# Altium PCB uku20710_proc.PcbDoc (part 1 of 3)
Units mm, origin at the board's own origin, x right, y up, seen from the top; angles counter-clockwise.
Board outline 354.7 x 156.7 mm, 4 copper layers (Top Layer, MidLayer1, MidLayer2, Bottom Layer); 286 components, 533 nets, 991 pads, 570 vias.
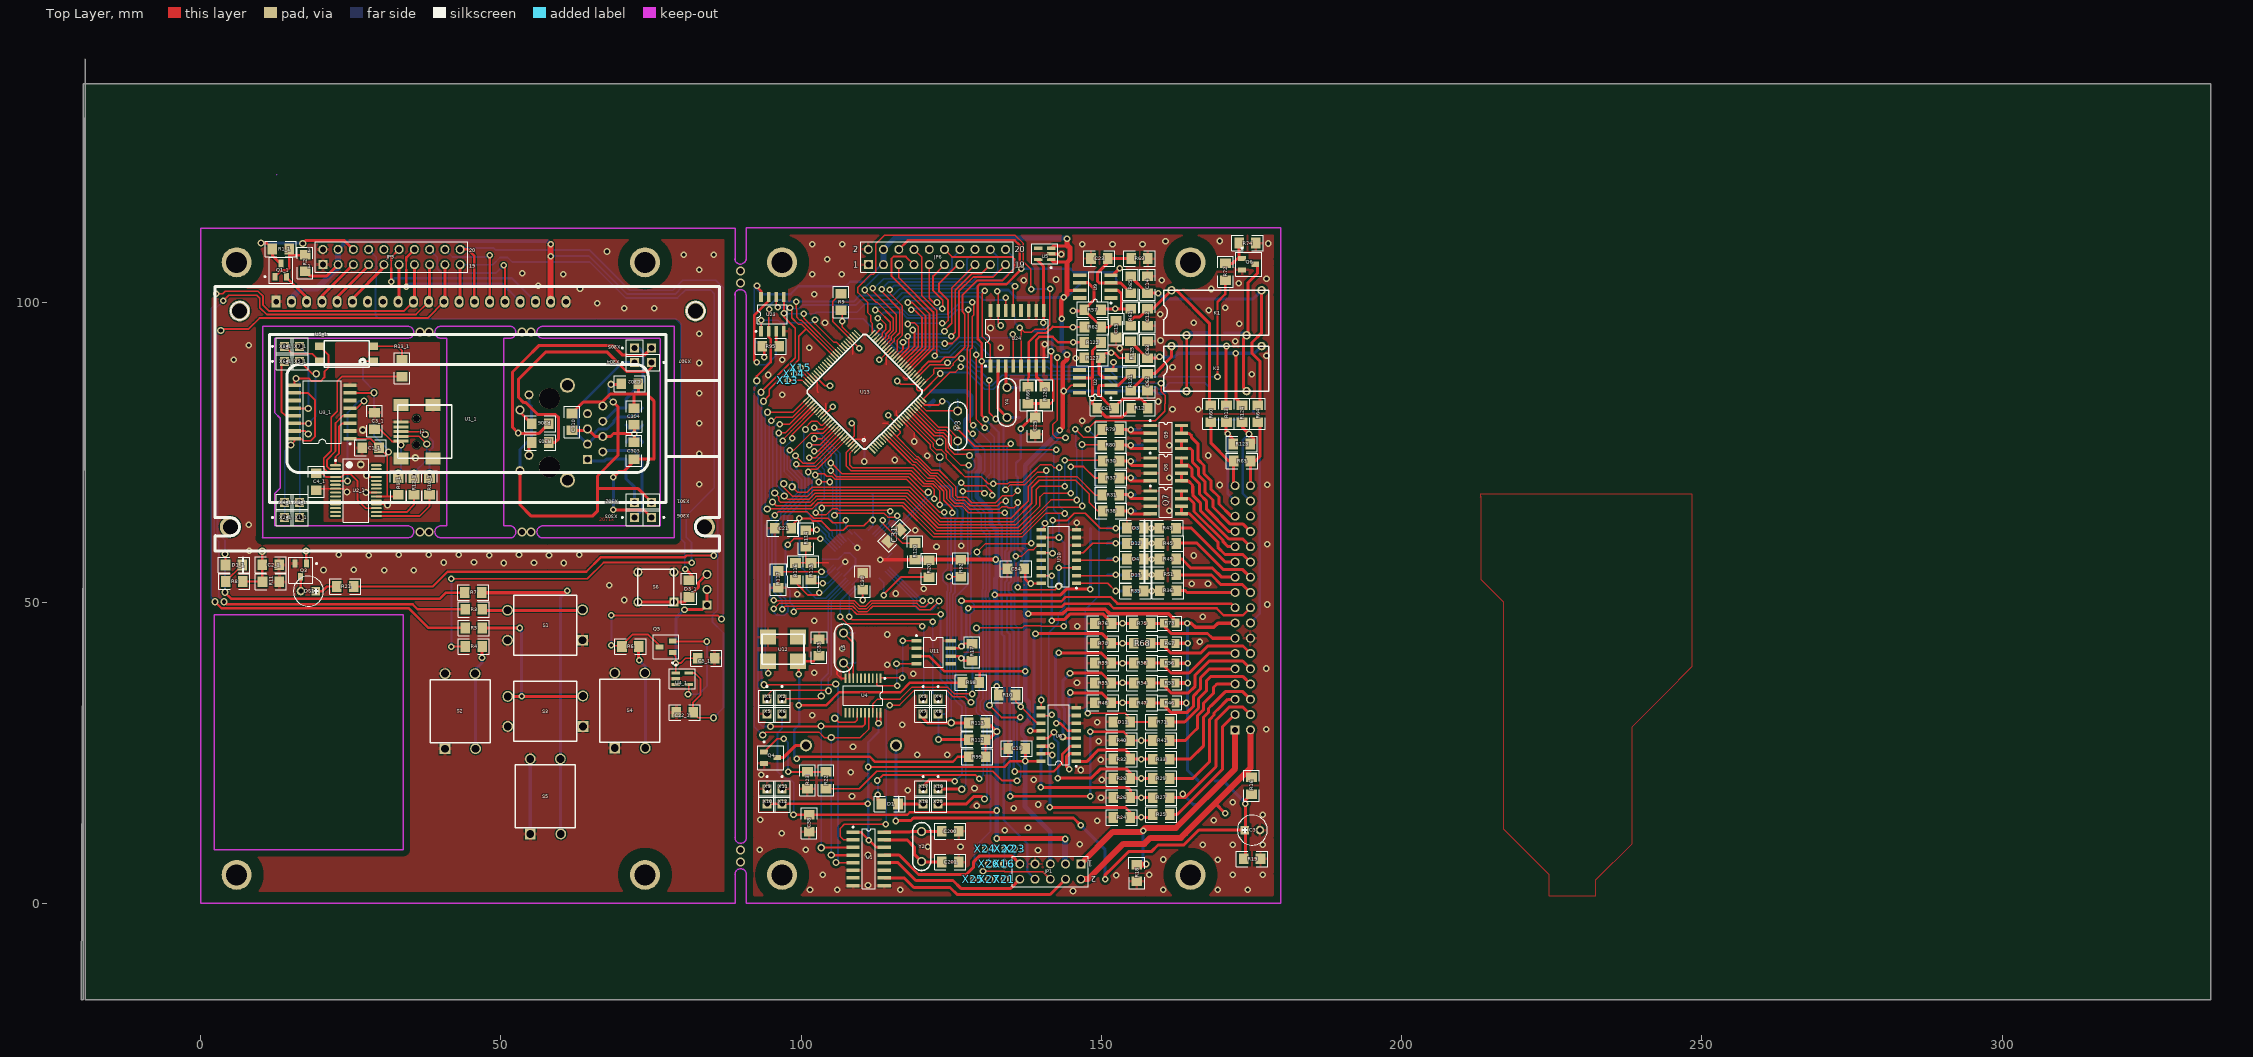
[diagram p0: Top Layer view]
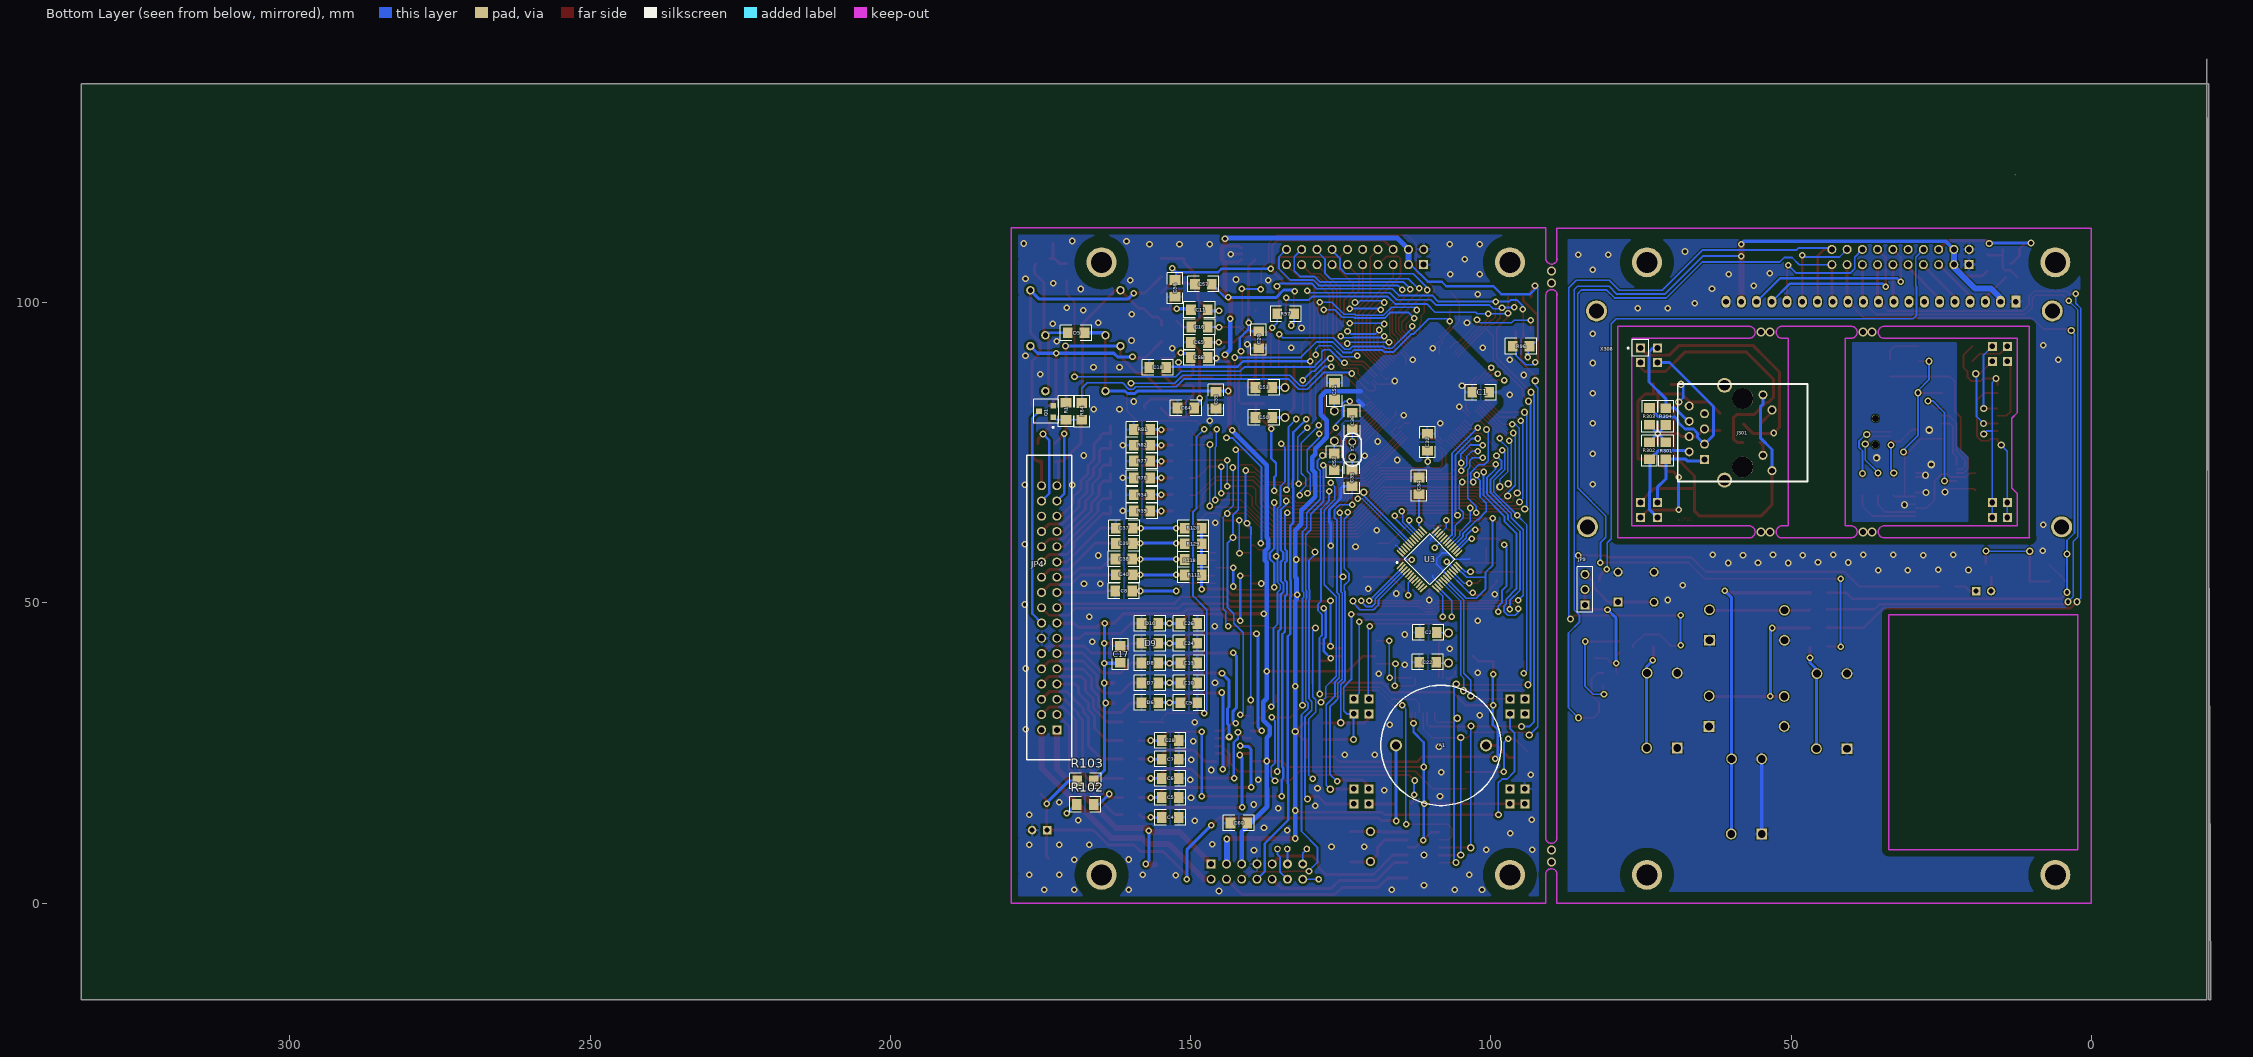
[diagram p1: Bottom Layer view, seen from below]

## Layer stack, top to bottom
Top Layer: signal copper 0.0356
Dielectric: core 0.32, FR-4, Dk 4.8
MidLayer1: signal copper 0.0356
Dielectric: prepreg 0.32, FR-4, Dk 4.8
MidLayer2: signal copper 0.0356
Dielectric: core 0.32, FR-4, Dk 4.8
Bottom Layer: signal copper 0.0356

## Board outline
-19.226,140.551 -19.226,-16.149 334.774,-16.149 334.774,136.401 -19.576,136.401 -19.576,-16.149 -19.926,-16.149

## Design rules (kind name [scope] priority, off if disabled: settings)
Clearance Holes [InPoly vs HasPad('Free-0') Or HasPad('Free-1') Or HasPad('Free-2') Or HasPad('Free-3')] p1: gap=2
Clearance Clearance_2 [All vs InPoly and InNet(GND_P)] p2: gap=1
Clearance Высоковольтное_2 [InNet(NetC511_2) or
InNet(NetD500_1) or
InNet(NetD503_1) or
InNet(NetD501_1) or
InNet(NetC500_2) or
InNet(NetC512_2) or
InNet(NetD500_2) or
InNet(NetD505_1) or
InNet(NetD506_1) or
InNet(NetD505_2) or
InNet(NetBT2_1) or
InNet(NetC516_2) or
InNet(NetC516_1) or
InNet(NetD20_2)  or
InNet(NetC510_1) or
InNet(NetC513_2) or
InNet(NetC517_1) vs InPoly] p3: gap=0.6
Clearance Высоковольтное [InNet(NetC505_2) or InNet(NetFU500_1)
or InNet(NetC511_1)or InNet(NetC502_2) vs InPoly] p4: gap=1
Clearance Clearance_1 [InComponent(U1)] p5: gap=0.19
Clearance Keep_Out [OnLayer('Keep-Out Layer')] p6: gap=1
Clearance Poly_Poly [InPoly vs InPoly] p7: gap=1
Clearance Poly [InPoly] p8: gap=0.4
Clearance "Для разъёма и индикатора" [InComponent(JP1) or InComponent(U2)] p9: gap=0.3
Clearance [All] p10: gap=0.18
ComponentClearance [All] p1: gap=0.254 collisioncheckmode=0
HoleSize [All] p1: absolutevalues=TRUE maxlimit=5 minlimit=0.025 maxpercent=80.000 minpercent=20.000
PolygonConnect [All] p1: connectstyle=Relief reliefconductorwidth=0.4 reliefentries=4 polygonreliefangle="90 Angle"
RoutingLayers [All] p1: top layer=Horizontal mid layer 1="Not Used" mid layer 2="Not Used" bottom layer=Vertical
RoutingVias [All] p1: holewidth=0.6 width=1.1 viastyle="Through Hole" minholewidth=0.6 minwidth=1.1 maxholewidth=0.7 maxwidth=1.2
SolderMaskExpansion [All] p1: expansion=0.102
TestPointUsage [All] p1: valid=0 allowmultiple=FALSE
Testpoint [All] p1: side=15 testpointundercomponent=TRUE minsize=1.016 maxsize=2.54 preferedsize=1.524 minholesize=0 maxholesize=1.016 preferedholesize=0.813 testpointgrid=0.025 style=1023 order=1234567890
Width [All] p1: maxlimit=2 minlimit=0.2 preferedwidth=0.254 toplayer_prefwidth=0.5 midlayer1_prefwidth=0.3 midlayer2_prefwidth=0.3 bottomlayer_prefwidth=0.5 minimp=50.000000 maximp=50.000000 favimp=50.000000
15 further rules are at their usual default settings.

## Classes and differential pairs
component class ETH: C21 C30 C31 C32 C33 C34 R20 R98 R99 R112 R113 R114 R115 R116 R117 R120 U3 U12 X1 X2 X3 X4 X5 X6 X7 X8
component class CPU: A1 C1 C2 C3 C22 C35 C36 C50 C51 C52 C53 C54 C55 C56 C57 C58 C60 C200 C201 D1 JP1 JP4 JP6 Q4 R9 R10 R16 R17 R18 R19 R22 R23 R92 R95 R96 R97 R102 R103 U1 U4 U5 U11 U13 U23 U24 X9 X10 X11 X12 X13 X14 X15 X16 X17 X18 X19 X20 X21 X22 X23 X24 X25 X26 X27 Y1 Y2 Y3 Y4 Y5
component class IBPV11: +IAKB1 C4 C5 C6 C7 C8 C9 C10 C11 C12 C13 C14 C15 C16 C17 C18 C19 C20 C23 C24 C25 C26 C28 C37 C38 C39 C40 C61 C62 C63 C64 C65 C66 D3 D4 D5 D6 D7 D8 D9 D10 D11 D12 D13 K1 K2 NetC25_1 NetJ1_2 NetU14_4 NetU14_5 P0_3 P0_8_ P0_9_ P1_29 P1_31 PROG1 Q1 Q6 Q7 Q8 Q9 R1 R12 R13 R24 R25 R26 R27 R28 R29 R30 R31 R32 R33 R34 R35 R36 R37 R38 R39 R40 R41 R43 R45 R46 R47 R48 R49 R51 R53 R54 R55 R56 R57 R58 R59 R60 R61 R62 R63 R64 R65 R66 R67 R68 R69 R70 R71 R72 R73 R74 R75 R76 R77 R78 R79 R80 R81 R82 R84 R111 R118 R121 R122 R123 R124 R125 R126 R127 R128 R129 U2 U6 U9 U10 UU2 X39 X40 X41 X42 X43 X44 X45 X46 X47

## Components (designator, comment, footprint, x,y, rotation, side; value= is the part's Value field where it differs from the comment)
A1 "EFM260" Pjezo15 103.3,26.258 r0 bottom
C1 "1.0" _1206#1 101.674,85.051 r180 bottom
C1_1 "1.0" _1206#1 28.307,75.819 r0 top (schematic designator C1)
C2 "Cap Semi" _1206#1 110.402,45.062 r180 bottom
C2_1 "1.0" _1206#2 11.653,56.314 r180 top (schematic designator C2)
C3 "22.0 x 50" el3 173.874,12.151 r0 top
C3_1 "1.0" C3216-1206 28.957,80.27 r270 top (schematic designator C3)
C4 "1.0" _1206#3 153.374,14.251 r180 bottom (schematic designator C11)
C4_1 "1.0" C3216-1206 19.255,70.168 r90 top (schematic designator C4)
C5 "1.0" _1206#3 153.374,17.551 r180 bottom
C5_1 "1.0" _1206#1 84.197,40.76 r180 top (schematic designator C5)
C6 "1.0" _1206#3 153.374,20.751 r180 bottom (schematic designator C7)
C7 "1.0" _1206#3 153.374,23.951 r180 bottom (schematic designator C13)
C8 "1.0" _1206#3 161.115,51.964 r0 bottom (schematic designator C?)
C9 "1.0" _1206#3 150.274,33.351 r180 bottom (schematic designator C8)
C10 "1.0" _1206#3 150.274,36.651 r180 bottom (schematic designator C16)
C11 "0.1" _1206#3 148.524,98.801 r0 bottom
C12 "1.0" _1206#3 157.674,97.551 r90 top
C13 "1.0" _1206#3 150.274,39.951 r180 bottom
C14 "1.0" _1206#3 157.674,102.951 r270 top
C15 "1.0" _1206#3 152.424,95.575 r90 top
C16 "1.0" _1206#3 148.524,95.901 r180 bottom
C17 "1.0" _1206#3 161.715,41.411 r270 bottom
C18 "1.0" _1206#3 155.474,89.151 r180 bottom
C19 "1.0" _1206#3 135.884,25.706 r0 top
C20 "1.0" _1206#3 138.659,93.804 r90 bottom
C21 "0.1" C3216-1206 96.975,62.402 r180 top
C22 "Cap Semi" _1206#1 110.502,40.111 r180 bottom
C22_1 "1.0" _1206#1 80.6,31.75 r180 top (schematic designator C?)
C23 "0.1" _1206#3 149.662,107.328 r180 top
C24 "1.0" _1206#3 150.274,43.251 r180 bottom
C25 "1.0" _1206#3 138.974,79.451 r90 top
C26 "1.0" _1206#3 150.274,46.551 r180 bottom
C28 "1.0" _1206#3 153.374,27.051 r180 bottom
C30 "0.1" _1206#1 110.252,53.537 r270 top
C31 "0.1" _1206#1 115.479,61.201 r45 top
C32 "0.1" _1206#1 110.551,76.719 r270 bottom
C33 "0.1" _1206#1 102.976,42.561 r90 top
C34 "10,0x16" C3216-1206 111.952,69.469 r90 bottom
C35 "33" _1206#1 123.124,70.801 r90 bottom
C36 "33" _1206#1 123.074,80.251 r270 bottom
C37 "1.0" _1206#1 161.065,62.417 r0 bottom
C38 "1.0" _1206#1 161.115,57.265 r0 bottom
C39 "1.0" _1206#1 161.065,59.866 r0 bottom
C40 "1.0" _1206#1 161.065,54.665 r0 bottom
C50 "10" _1206#1 137.774,80.851 r180 bottom
C51 "10" _1206#3 126.024,85.251 r270 bottom
C52 "10" _1206#3 126.074,73.451 r90 bottom
C53 "10" _1206#1 137.774,85.851 r180 bottom
C54 "1.0" _1206#3 135.758,55.665 r0 top
C55 "1.0" _1206#3 145.774,83.751 r90 bottom
C56 "1.0" _1206#3 152.574,102.351 r90 bottom
C57 "1.0" _1206#3 147.874,103.051 r180 bottom
C58 "1.0" _1206#1 101.326,13.303 r90 top
C60 "1.0" _1206#3 141.96,13.304 r180 bottom
C61 "0.1" _1206#3 150.724,82.401 r0 top
C62 "1.0" _1206#3 157.674,86.751 r90 top
C63 "1.0" _1206#3 157.674,92.151 r270 top
C64 "1.0" _1206#3 150.774,82.451 r180 bottom
C65 "1.0" _1206#3 148.574,93.351 r180 bottom
C66 "0.1" _1206#3 148.574,90.851 r180 bottom
C200 "10" _1206#1 124.805,11.954 r180 top (schematic designator C2)
C201 "10" _1206#1 124.805,6.803 r180 top
C302 "0.1" C3216-1206 71.468,86.472 r180 top
C303 "0.1" C3216-1206 72.169,75.316 r90 top
C304 "0.1" C3216-1206 72.169,81.016 r270 top
C310 "0.1" C3216-1206 61.816,80.12 r270 top (schematic designator C301)
D1 "LL4148" _1206d#1 114.729,16.504 r180 top
D1_1 "LL4148" _1206d#2 5.548,56.278 r180 top (schematic designator D1)
D3 "BZV55-C5V6" _1206d#1 155.663,62.417 r180 top
D3_1 "LL4148" _1206d#3 81.35,52.35 r90 top (schematic designator D3)
D4 "BZV55-C5V6" _1206d#1 155.663,57.265 r180 top
D5 "LL4148" _1206d#4 169.074,94.951 r0 bottom
D6 "BZV55-C5V6" _1206d#1 156.774,33.351 r0 bottom
D7 "BZV55-C5V6" _1206d#1 156.774,36.651 r0 bottom
D8 "BZV55-C5V6" _1206d#4 156.774,39.951 r0 bottom
D9 "BZV55-C5V6" _1206d#4 156.774,43.251 r0 bottom
D10 "BZV55-C5V6" _1206d#1 156.774,46.551 r0 bottom
D11 "BZV55-C3V9" _1206d#1 153.374,30.151 r180 top
D12 "BZV55-C5V6" _1206d#1 155.663,59.866 r180 top
D13 "BZV55-C5V6" _1206d#1 155.663,54.665 r180 top
DS1 "LED0" el3 19.197,51.927 r180 top
J1 "miniUSB" USBmini 41.811,78.5 r90 top
J301 "J0011D21B" J0011D21B 58.069,78.316 r270 bottom
JP1 "PBD-10" HDR2X5 146.561,6.501 r180 top
JP4 "IDC34" IDC34M 172.274,28.851 r90 bottom
JP5 "PLHD-20" HDR2X10 20.35,106.3 r0 top
JP6 "PBD-20" HDR2X10 111.174,106.301 r0 top
JP9 "PLS-3" HDR1X3 84.321,49.663 r90 bottom
K1 "DH1A" kuan 161.674,94.551 r0 top
K2 "DH1A" kuan 161.674,85.251 r0 top
Q1 "IRLML2402" SO-G3/Z3.3 174.068,81.872 r90 bottom
Q1_1 "BC856" SO-G3#1 13.353,105.4 r0 top (schematic designator Q1)
Q3 "BC846" SO-G3#2 16.654,55.414 r180 top
Q4 "BC846" SO-G3#1 94.924,24.206 r270 top
Q5 "IRLML2402" SO-G3#1 77.5,42.65 r90 top (schematic designator Q?)
Q6 "BC846" SO-G3#1 174.524,106.378 r270 top
Q7 "IRF7103" SO-G8/Y2.2#1 160.724,66.701 r270 top
Q8 "IRF7103" SO-G8/Y2.2#2 160.724,72.201 r270 top
Q9 "IRF7103" SO-G8/Y2.2#2 160.724,77.601 r270 top
R1 "10K" _1206#1 170.717,81.872 r270 bottom
R1_1 "2K2" _1206#4 13.353,108.927 r0 top (schematic designator R90)
R2 "7K5" _1206#4 17.404,106.577 r270 top (schematic designator R89)
R3 "2K7" _1206#1 45.45,48.9 r180 top
R4 "2K7" _1206#1 45.45,42.7 r180 top
R5 "2K7" _1206#1 45.45,45.8 r180 top
R6 "2K7" _1206#1 71.55,42.7 r180 top
R7 "2K7" _1206#4 45.4,51.7 r180 top (schematic designator R11)
R8 "2K7" _1206#2 5.597,53.527 r180 top
R9 "10K" _1206#1 106.65,100.075 r270 top
R9_1 "1R" _1206#1 32.908,69.367 r270 top (schematic designator R9)
R10 "2K7" _1206#1 134.284,34.659 r180 top
R10_1 "20R" _1206#1 38.11,69.367 r270 top (schematic designator R10)
R11 "10K" _1206#2 11.703,53.513 r0 top
R12 "20K" _1206#1 156.324,82.401 r180 top
R12_1 "20R" _1206#1 35.509,69.367 r270 top (schematic designator R12)
R13 "10R" _1206#1 170.817,81.472 r270 top
R13_1 "200R" _1206#1 33.508,89.072 r90 top (schematic designator R?)
R16 "10K" _1206#1 174.974,19.551 r90 top
R17 "K10" _1206#3 128.456,41.762 r90 top
R18 "1R" _1206#3 155.889,5.001 r270 top
R19 "2K7" _1206#1 175.074,7.351 r180 top
R20 "10K" _1206#1 121.302,55.687 r90 top
R21 "270R" _1206#2 24.103,52.727 r0 top
R22 "1K0" _1206#1 104.126,20.455 r90 top
R23 "10K" _1206#1 101.025,20.455 r90 top
R24 "1K0" _1206#1 153.374,14.251 r180 top
R25 "33K" _1206#1 159.974,14.754 r0 top
R26 "1K0" _1206#1 153.374,17.551 r180 top
R27 "33K" _1206#1 159.974,17.551 r0 top
R28 "1K0" _1206#1 153.374,20.751 r180 top
R29 "33K" _1206#1 159.974,20.751 r0 top
R30 "1K0" _1206#1 151.624,73.601 r0 top
R31 "1K0" _1206#1 151.574,67.951 r0 top
R32 "1K0" _1206#1 153.374,23.951 r180 top
R33 "33K" _1206#1 159.974,23.951 r0 top
R34 "10K" _1206#1 158.074,68.001 r180 bottom
R35 "1K0" _1206#1 155.663,51.964 r180 top (schematic designator R?)
R36 "33K" _1206#1 161.115,52.014 r0 top (schematic designator R?)
R37 "1K0" _1206#1 151.624,70.801 r0 top
R38 "1K0" _1206#4 151.624,65.301 r0 top
R39 "10K" _1206#1 158.074,65.301 r180 bottom
R40 "1K0" _1206#1 153.374,27.051 r180 top
R41 "10K" _1206#1 159.974,27.051 r0 top
R43 "6K2" _1206#1 161.015,62.417 r180 top
R45 "6K2" _1206#1 161.065,59.866 r180 top
R46 "1K0" _0805 161.374,33.351 r0 top
R47 "2K7" _1206#1 156.774,33.351 r180 top
R48 "10K" _1206#1 150.274,33.351 r0 top
R49 "6K2" _1206#1 161.065,57.265 r180 top
R51 "6K2" _1206#1 161.065,54.665 r180 top
R53 "1K0" _0805 161.374,36.651 r0 top
R54 "2K7" _1206#1 156.774,36.651 r180 top
R55 "10K" _1206#1 150.274,36.651 r0 top
R56 "1K0" _0805 161.374,39.951 r0 top
R57 "20K" _1206#1 148.524,98.801 r180 top
R58 "2K7" _1206#1 156.774,39.951 r180 top
R59 "10K" _1206#1 150.274,39.951 r0 top
R60 "10R" _1206#1 168.216,81.472 r270 top
R61 "2K0" _1206#1 154.874,97.551 r90 top
R62 "20K" _1206#1 148.574,95.901 r180 top
R63 "10R" _1206#4 173.418,73.62 r180 top
R64 "10R" _1206#4 176.018,81.472 r270 top
R65 "2K0" _1206#4 154.874,102.951 r270 top
R66 "20K" _1206#1 137.774,84.551 r270 top
R67 "1K0" _0805 161.374,43.212 r0 top
R68 "2K7" _1206#1 156.774,43.251 r180 top
R69 "20K" _1206#1 156.324,107.301 r180 top
R70 "10K" _1206#1 150.274,43.251 r0 top
R71 "20K" _1206#1 159.974,30.151 r0 top
R72 "1K0" _1206#4 170.667,105.128 r90 top
R73 "1K0" _0805 161.374,46.613 r0 top
R74 "10K" _1206#1 174.318,109.879 r180 top
R75 "2K7" _1206#1 156.774,46.551 r180 top
R76 "10K" _1206#4 150.274,46.551 r0 top
R77 "10K" _1206#1 158.074,73.601 r180 bottom
R78 "10K" _1206#1 158.074,70.801 r180 bottom
R79 "1K0" _1206#1 151.574,78.851 r0 top
R80 "1K0" _1206#1 151.574,76.251 r0 top
R81 "10K" _1206#1 158.074,78.851 r180 bottom
R82 "10K" _1206#1 158.074,76.251 r180 bottom
R84 "1K0" _1206#3 168.116,81.872 r270 bottom
R92 "1K0" _1206#1 126.556,55.751 r90 top
R95 "2K7" _1206#1 94.924,92.701 r180 top
R96 "2K7" _1206#1 94.974,92.701 r0 bottom
R97 "1K0" _1206#1 134.158,98.126 r180 bottom
R98 "1R" _1206#1 128.282,36.709 r0 top
R99 "1R" _1206#1 129.333,24.356 r0 top
R102 "10R" _1206#1 167.542,16.404 r0 bottom
R103 "10R" _1206#1 167.492,20.355 r180 bottom
R111 "33K" _1206#1 149.574,54.615 r0 bottom (schematic designator R?)
R112 "2K2" _1206#1 129.307,27.208 r0 top
R113 "2K2" _1206#1 129.307,30.009 r0 top
R114 "2K2" _1206#1 100.776,60.687 r270 top
R115 "2K2" _1206#1 101.652,55.237 r90 top
R116 "2K2" _1206#1 99.052,55.237 r90 top
R117 "4K87" _1206#1 96.174,53.899 r90 top
R118 "33K" _1206#1 149.574,57.215 r0 bottom (schematic designator R?)
R120 "2K2" _1206#1 118.952,58.537 r270 top (schematic designator R100)
R121 "2K0" _1206#1 154.874,86.751 r90 top (schematic designator R101)
R122 "20K" _1206#1 148.524,93.351 r180 top (schematic designator R102)
R123 "10R" _1206#1 173.368,76.42 r180 top (schematic designator R103)
R124 "10R" _1206#1 173.418,81.472 r270 top (schematic designator R104)
R125 "2K0" _1206#1 154.874,92.151 r270 top (schematic designator R105)
R126 "20K" _1206#1 140.574,84.551 r270 top (schematic designator R106)
R127 "20K" _1206#1 148.524,90.801 r0 top (schematic designator R107)
R128 "33K" _1206#1 149.574,62.401 r0 bottom (schematic designator R?)
R129 "33K" _1206#1 149.574,59.816 r0 bottom (schematic designator R?)
R301 "51R" _1206#1 70.869,75.316 r90 bottom
R302 "51R" _1206#1 73.569,75.316 r270 bottom
R303 "51R" _1206#1 73.569,81.016 r270 bottom
R304 "51R" _1206#1 70.869,81.016 r90 bottom
R305 "K10" _1206#1 56.569,76.716 r0 top
R306 "K10" _1206#1 56.569,79.816 r0 top
S1 "SWT-9" SWT-9 63.6,43.75 r180 top (schematic designator S2)
S2 "SWT-9" SWT-9 40.7,25.7 r90 top (schematic designator S4)
S3 "SWT-9" SWT-9 63.65,29.4 r180 top (schematic designator S1)
S4 "SWT-9" SWT-9 68.97,25.8 r90 top (schematic designator S5)
S5 "SWT-9" SWT-9 54.9,11.5 r90 top (schematic designator S3)
S6 "SWT-6" SWT-6 78.8,50.1 r180 top
U1 "SC16IS740" SO-G16 111.252,7.353 r270 top
U1_1 "AG1232G" AG1232G 44.45,80.7 r0 top (schematic designator U4)
U2 "OP07CS" SO-G8#1 148.974,86.851 r90 top
U2_1 "FT232R" SOP65P780-28L 25.857,68.667 r0 top (schematic designator U2)
U3 "DP8348C" F-QFP7X7-G48/N 110.202,57.237 r135 bottom
U3_1 "ISO7231" SO-G16/D10.4 20.255,81.771 r90 top (schematic designator U3)
U4 "MCP2515" TSSO6X6-G20/D6.6 110.302,34.56 r180 top
U4_1 "TPS3823" SO-G5/P.95 80.2,37.35 r270 top (schematic designator U?)
U5 "TPS76333" SO-G5/P.95 140.558,108.101 r90 top
U5_1 "FOD817ASD" FOD817ASD 28.807,90.223 r90 top (schematic designator U5)
U6 "MC14051BD" SO-G16/C5.85#1 142.874,28.051 r90 top
U9 "OP07CS" SO-G8#2 148.974,102.651 r90 top
U10 "MC14051BD" SO-G16/C5.85#2 142.924,57.701 r90 top
U11 "TJA1050" SO-G8/D5 122.055,41.762 r270 top
U12 "KXO-97-50MGz" KXO-97 96.974,42.261 r180 top
U13 "LPC1766FBD100" LPC2368 110.574,85.151 r45 top
U23 "25LC640" SO-G8/D5 95.224,98.051 r0 top
U24 "AD7705" SO-G16/D10.4 135.974,94.051 r0 top
X1 "" PIN1#1 94.322,34.001 r0 top
X1_1 "" PIN1#2 16.5,64.2 r90 top (schematic designator X1)
X2 "" PIN1#1 96.822,34.001 r0 top
X2_1 "" PIN1#2 14,64.2 r90 top (schematic designator X2)
X3 "" PIN1#1 120.322,34.001 r0 top
X3_1 "" PIN1#2 16.5,66.7 r90 top (schematic designator X3)
X4 "" PIN1#2 122.822,34.001 r0 top
X4_1 "" PIN1#2 14,66.7 r90 top (schematic designator X4)
X5 "" PIN1#2 94.322,31.501 r0 top
X5_1 "" PIN1#2 16.5,90.2 r90 top (schematic designator X5)
X6 "" PIN1#2 96.822,31.501 r0 top
X6_1 "" PIN1#2 14,90.2 r90 top (schematic designator X6)
X7 "" PIN1#2 120.322,31.501 r0 top
X7_1 "" PIN1#2 16.5,92.7 r90 top (schematic designator X7)
X8 "" PIN1#2 122.822,31.501 r0 top
X8_1 "" PIN1#2 14,92.7 r90 top (schematic designator X8)
X9 "" PIN1#3 94.322,19.001 r0 top
X10 "" PIN1#3 94.322,16.501 r0 top
X11 "" PIN1#3 96.822,19.001 r0 top
X12 "" PIN1#3 96.822,16.501 r0 top
X13 "" PIN1#4 209.235,4.06 r90 top
X14 "" PIN1#5 203.634,4.06 r90 top
X15 "" PIN1#6 183.529,3.01 r90 top
X16 "" PIN1#7 136.467,-4.292 r90 top
X17 "" PIN1#3 120.322,19.001 r0 top
X18 "" PIN1#3 120.322,16.501 r0 top
X19 "" PIN1#3 122.822,19.001 r0 top
X20 "" PIN1#3 122.822,16.501 r0 top
X21 "" PIN1#8 238.693,4.06 r90 top
X22 "" PIN1#9 233.059,11.203 r90 top
X23 "" PIN1#10 134.384,-6.102 r90 top
X24 "" PIN1#11 125.432,-5.401 r90 top
X25 "" PIN1#12 132.183,-5.801 r90 top
X26 "" PIN1#13 101.276,-4.251 r90 top
X27 "" PIN1#14 107.26,-4.292 r90 top
X301 "" PIN1#1 75.069,66.716 r270 top
X302 "" PIN1#1 72.269,66.716 r90 top
X303 "" PIN1#1 72.269,64.216 r90 top
X304 "" PIN1#1 72.269,90.016 r90 top
X305 "" PIN1#1 72.269,92.416 r90 top
X306 "" PIN1#1 75.069,64.216 r270 top
X307 "" PIN1#1 75.069,90.016 r270 top
X308 "" PIN1#1 75.069,92.416 r90 bottom
Y1 "32768" QWARZ2 123.079,76.75 r270 bottom
Y2 "10MGz" QWARZ1 120.054,6.903 r90 top
Y3 "10MGz" QWARZ1 126.074,81.951 r270 top
Y4 "4,9152MGz" QWARZ1 134.274,80.851 r90 top
Y5 "8MGz" QWARZ1 107.051,39.961 r90 top

## Footprints (in the part's own frame and the unit in brackets; to place one, negate y for a bottom-side part, rotate by r counter-clockwise, add the part's x,y. Pads: shape width x height; smd on the part's side, far side on the other; paste and mask are expansions set on the pad)
_0805 [mm]
  rect 1.3x1.5 smd: 1(-0.942,-0.005) 2(0.958,-0.005)
  silkscreen extent -1.99,-1.16 2.01,1.14
_1206#1 [mm]
  rect 1.6x1.8 smd: 1(-1.412,-0.007) 2(1.388,-0.007)
  silkscreen extent -2.61,-1.31 2.59,1.29
_1206#2 [mm]
  rect 1.6x1.8 smd: 1(-1.409,-0.014) 2(1.391,-0.015)
  silkscreen extent -2.61,-1.31 2.59,1.29
_1206#3 [mm]
  rect 1.6x1.8 smd: 1(-1.397,0.003) 2(1.403,0.003)
  silkscreen extent -2.6,-1.3 2.6,1.3
_1206#4 [mm]
  rect 1.6x1.8 smd: 1(-1.4,0) 2(1.4,0)
  silkscreen extent -2.6,-1.3 2.6,1.3
_1206d#1 [mm]
  rect 1.6x1.8 smd: 1(1.395,-0.009) 2(-1.405,-0.009)
  silkscreen extent -2.6,-1.31 2.6,1.29
_1206d#2 [mm]
  rect 1.6x1.8 smd: 1(1.403,-0.017) 2(-1.397,-0.017)
  silkscreen extent -2.6,-1.32 2.6,1.28
_1206d#3 [mm]
  rect 1.6x1.8 smd: 1(1.405,0.012) 2(-1.395,0.012)
  silkscreen extent -2.6,-1.29 2.6,1.31
_1206d#4 [mm]
  rect 1.6x1.8 smd: 1(1.4,0) 2(-1.4,0)
  silkscreen extent -2.6,-1.3 2.6,1.3
AG1232G [mm]
  rect 1.5x2 hole 0.95: 1(-31.877,19.431)
  oval 1.5x2 hole 0.95: 2(-29.337,19.431) 3(-26.797,19.431) 4(-24.257,19.431) 5(-21.717,19.431) 6(-19.177,19.431) 7(-16.637,19.431) 8(-14.097,19.431) 9(-11.557,19.431) 10(-9.017,19.431) 11(-6.477,19.431) 12(-3.937,19.431) 13(-1.397,19.431) 14(1.143,19.431) 15(3.683,19.431) 16(6.223,19.431) 17(8.763,19.431) 18(11.303,19.431) 19(13.843,19.431) 20(16.383,19.431)
  silkscreen extent -42.04,-22.1 41.96,21.97
C3216-1206 [mm]
  rect 1.6x1.8 smd: 1(-1.4,0) 2(1.4,0)
  silkscreen extent -2.6,-1.3 2.6,1.3
el3 [mm]
  rect 1.4x1.4 hole 0.85: 1(0.011,-0.008)
  round 1.4 hole 0.85: 2(2.511,-0.008)
  silkscreen extent -1.23,-2.51 3.76,2.49
F-QFP7X7-G48/N [mm]
  rect 1.55x0.3 smd: 1(-4.192,2.749) 2(-4.192,2.249) 3(-4.192,1.749) 4(-4.192,1.249) 5(-4.192,0.749) 6(-4.192,0.249) 7(-4.192,-0.251) 8(-4.192,-0.751) 9(-4.192,-1.251) 10(-4.192,-1.751) 11(-4.192,-2.251) 12(-4.192,-2.751) 25(4.158,-2.751) 26(4.158,-2.251) 27(4.158,-1.751) 28(4.158,-1.251) 29(4.158,-0.751) 30(4.158,-0.251) 31(4.158,0.249) 32(4.158,0.749) 33(4.158,1.249) 34(4.158,1.749) 35(4.158,2.249) 36(4.158,2.749)
  rect 0.3x1.55 smd: 13(-2.767,-4.176) 14(-2.267,-4.176) 15(-1.767,-4.176) 16(-1.267,-4.176) 17(-0.767,-4.176) 18(-0.267,-4.176) 19(0.233,-4.176) 20(0.733,-4.176) 21(1.233,-4.176) 22(1.733,-4.176) 23(2.233,-4.176) 24(2.733,-4.176) 37(2.733,4.174) 38(2.233,4.174) 39(1.733,4.174) 40(1.233,4.174) 41(0.733,4.174) 42(0.233,4.174) 43(-0.267,4.174) 44(-0.767,4.174) 45(-1.267,4.174) 46(-1.767,4.174) 47(-2.267,4.174) 48(-2.767,4.174)
  silkscreen extent -4.32,-3 2.98,3.57
FOD817ASD [mm]
  rect 1.3x1.5 smd: 1(0,0) 2(2.5,0) 3(2.5,9) 4(0,9)
  silkscreen extent -0.97,0.75 3.4,8.22
HDR1X3 [mm]
  rect 1.5x1.5 hole 1: 1(0,0)
  round 1.5 hole 1: 2(2.54,0) 3(5.08,0)
  silkscreen extent -1.27,-1.27 6.35,1.27
HDR2X5 [mm]
  rect 1.5x1.5 hole 1: 1(0,0)
  round 1.5 hole 1: 2(0,2.54) 3(2.54,0) 4(2.54,2.54) 5(5.08,0) 6(5.08,2.54) 7(7.62,0) 8(7.62,2.54) 9(10.16,0) 10(10.16,2.54)
  silkscreen extent -1.27,-1.27 11.43,3.81
HDR2X10 [mm]
  rect 1.5x1.5 hole 1: 1(0,0)
  round 1.5 hole 1: 2(0,2.54) 3(2.54,0) 4(2.54,2.54) 5(5.08,0) 6(5.08,2.54) 7(7.62,0) 8(7.62,2.54) 9(10.16,0) 10(10.16,2.54) 11(12.7,0) 12(12.7,2.54) 13(15.24,0) 14(15.24,2.54) 15(17.78,0) 16(17.78,2.54) 17(20.32,0) 18(20.32,2.54) 19(22.86,0) 20(22.86,2.54)
  silkscreen extent -1.27,-1.27 24.13,3.81
IDC34M [mm]
  rect 1.5x1.5 hole 1: 1(0,0)
  round 1.5 hole 1: 2(0,2.54) 3(2.54,0) 4(2.54,2.54) 5(5.08,0) 6(5.08,2.54) 7(7.62,0) 8(7.62,2.54) 9(10.16,0) 10(10.16,2.54) 11(12.7,0) 12(12.7,2.54) 13(15.24,0) 14(15.24,2.54) 15(17.78,0) 16(17.78,2.54) 17(20.32,0) 18(20.32,2.54) 19(22.86,0) 20(22.86,2.54) 21(25.4,0) 22(25.4,2.54) 23(27.94,0) 24(27.94,2.54) 25(30.48,0) 26(30.48,2.54) 27(33.02,0) 28(33.02,2.54) 29(35.56,0) 30(35.56,2.54) 31(38.1,0) 32(38.1,2.54) 33(40.64,0) 34(40.64,2.54)
  silkscreen extent -5,-2.5 45.7,5
J0011D21B [mm]
  round 2.5 hole 1.8: 0(-7.9,-3) 0(7.9,-3)
  round 3.5 hole 3.5: 0(-5.7,0) 0(5.7,0)
  rect 1.5x1.5 hole 0.95: 1(4.445,-6.35)
  round 1.5 hole 0.95: 2(3.175,-8.9) 3(1.905,-6.35) 4(0.635,-8.9) 5(-0.635,-6.35) 6(-1.905,-8.9) 7(-3.175,-6.35) 8(-4.445,-8.9) 9(6.31,4.9) 10(3.77,3.38) 11(-3.8,4.9) 12(-6.31,3.38)
  silkscreen extent -8.1,-10.8 8.1,10.8
kuan [mm]
  round 1.4 hole 0.85: 1(15.006,7.49) 3(0.006,7.49) 4(2.506,-0.01) 5(12.506,-0.01)
  silkscreen extent -1.34,-0.01 16.21,7.49
KXO-97 [mm]
  rect 2.7x2.5 smd: 1(-2.5,-2) 2(2.5,-2) 3(2.5,2) 4(-2.5,2)
  silkscreen extent -3.5,-2.5 3.5,2.5
LPC2368 [mm]
  rect 0.25x1.5 smd: 1(-6,-7.775)
  oval 0.25x1.5 smd: 2(-5.5,-7.75) 3(-5,-7.75) 4(-4.5,-7.75) 5(-4,-7.75) 6(-3.5,-7.75) 7(-3,-7.75) 8(-2.5,-7.75) 9(-2,-7.75) 10(-1.5,-7.75) 11(-1,-7.75) 12(-0.5,-7.75) 13(0,-7.75) 14(0.5,-7.75) 15(1,-7.75) 16(1.5,-7.75) 17(2,-7.75) 18(2.5,-7.75) 19(3,-7.75) 20(3.5,-7.75) 21(4,-7.75) 22(4.5,-7.75) 23(5,-7.75) 24(5.5,-7.75) 25(6,-7.75) 51(6,7.75) 52(5.5,7.75) 53(5,7.75) 54(4.5,7.75) 55(4,7.75) 56(3.5,7.75) 57(3,7.75) 58(2.5,7.75) 59(2,7.75) 60(1.5,7.75) 61(1,7.75) 62(0.5,7.75) 63(0,7.75) 64(-0.5,7.75) 65(-1,7.75) 66(-1.5,7.75) 67(-2,7.75) 68(-2.5,7.75) 69(-3,7.75) 70(-3.5,7.75) 71(-4,7.75) 72(-4.5,7.75) 73(-5,7.75) 74(-5.5,7.75) 75(-6,7.75)
  oval 1.5x0.25 smd: 26(7.75,-6) 27(7.75,-5.5) 28(7.75,-5) 29(7.75,-4.5) 30(7.75,-4) 31(7.75,-3.5) 32(7.75,-3) 33(7.75,-2.5) 34(7.75,-2) 35(7.75,-1.5) 36(7.75,-1) 37(7.75,-0.5) 38(7.75,0) 39(7.75,0.5) 40(7.75,1) 41(7.75,1.5) 42(7.75,2) 43(7.75,2.5) 44(7.75,3) 45(7.75,3.5) 46(7.75,4) 47(7.75,4.5) 48(7.75,5) 49(7.75,5.5) 50(7.75,6) 76(-7.75,6) 77(-7.75,5.5) 78(-7.75,5) 79(-7.775,4.475) 80(-7.75,4) 81(-7.75,3.5) 82(-7.75,3) 83(-7.75,2.5) 84(-7.75,2) 85(-7.75,1.5) 86(-7.75,1) 87(-7.75,0.5) 88(-7.75,0) 89(-7.75,-0.5) 90(-7.75,-1) 91(-7.75,-1.5) 92(-7.75,-2) 93(-7.75,-2.5) 94(-7.775,-3.025) 95(-7.75,-3.5) 96(-7.75,-4) 97(-7.75,-4.5) 98(-7.75,-5) 99(-7.75,-5.5) 100(-7.75,-6)
  silkscreen extent -6.93,-6.93 6.93,6.93
PIN1#1 [mm]
  rect 1.5x1.5 hole 1: 1(0,0)
  silkscreen extent -1.4,-1.4 1.4,2.17
PIN1#2 [mm]
  rect 1.5x1.5 hole 0.95: 1(0,0)
  silkscreen extent -1.4,-1.4 1.4,2.17
PIN1#3 [mm]
  rect 1.5x1.5 hole 0.9: 1(0,0)
  silkscreen extent -1.4,-1.4 1.4,2.17
PIN1#4 [mm]
  round 1.1 hole 0.6: 1(82.962,111.464)
PIN1#5 [mm]
  round 1.1 hole 0.6: 1(84.062,104.762)
PIN1#6 [mm]
  round 1.1 hole 0.6: 1(86.141,83.604)
PIN1#7 [mm]
  round 1.5 hole 0.9: 1(10.793,2.606)
PIN1#8 [mm]
  round 1.5 hole 0.9: 1(-0.099,104.832)
PIN1#9 [mm]
  round 1.1 hole 0.6: 1(-2.201,99.187)
PIN1#10 [mm]
  round 1.1 hole 0.6: 1(15.104,-1.15)
PIN1#11 [mm]
  round 1.1 hole 0.6: 1(14.404,-5.201)
PIN1#12 [mm]
  round 1.1 hole 0.6: 1(9.752,3.501)
PIN1#13 [mm]
  round 1.5 hole 0.9: 1(10.752,-30.045)
PIN1#14 [mm]
  round 1.5 hole 0.9: 1(8.253,-24.061)
Pjezo15 [mm]
  round 2 hole 1.3: 1(-2.503,0.012) 2(12.497,0.012)
  silkscreen extent -5.02,-10 15.01,10.02
QWARZ1 [mm]
  round 1.5 hole 1: 1(0.008,0) 2(5.008,0)
  silkscreen extent -1.49,-1.5 6.51,1.5
QWARZ2 [mm]
  round 1.3 hole 0.85: 1(0.001,0.005) 2(2.501,0.005)
  silkscreen extent -1.5,-1.5 4,1.5
SO-G3#1 [mm]
  rect 0.85x1.3 smd: 1(-0.948,-1.102) 2(0.952,-1.102) 3(0.002,1.098)
  silkscreen extent -2.77,-2.15 2,2.15
SO-G3#2 [mm]
  rect 0.85x1.3 smd: 1(-0.944,-1.105) 2(0.956,-1.105) 3(0.006,1.095)
  silkscreen extent -2.77,-2.16 2.01,2.14
SO-G3/Z3.3 [mm]
  rect 0.9x0.95 smd: 1(-0.954,-1.179) 2(0.946,-1.179) 3(-0.004,1.171)
  silkscreen extent -2.78,-2.05 2,2.05
SO-G5/P.95 [mm]
  rect 0.55x1.45 smd: 1(-0.95,-1.075) 2(0,-1.075) 3(0.95,-1.075) 4(0.95,1.075) 5(-0.95,1.075)
  silkscreen extent -2.42,-2.2 1.65,2.2
SO-G8#1 [mm]
  rect 0.6x2.2 smd: 1(-1.905,-2.6) 2(-0.635,-2.6) 3(0.635,-2.6) 4(1.905,-2.6) 5(1.905,2.6) 6(0.635,2.6) 7(-0.635,2.6) 8(-1.905,2.6)
  silkscreen extent -2.88,-2.72 2.5,1.1
SO-G8#2 [mm]
  rect 0.6x2.2 smd: 1(-1.902,-2.611) 2(-0.632,-2.611) 3(0.638,-2.611) 4(1.908,-2.611) 5(1.908,2.589) 6(0.638,2.589) 7(-0.632,2.589) 8(-1.902,2.589)
  silkscreen extent -2.88,-2.74 2.5,1.09
SO-G8/D5 [mm]
  rect 0.6x1.7 smd: 1(-1.905,-2.85) 2(-0.635,-2.85) 3(0.635,-2.85) 4(1.905,-2.85) 5(1.905,2.85) 6(0.635,2.85) 7(-0.635,2.85) 8(-1.905,2.85)
  silkscreen extent -2.88,-2.97 2.5,1.6
SO-G8/Y2.2#1 [mm]
  rect 0.55x2.2 smd: 1(-1.91,-2.588) 2(-0.64,-2.588) 3(0.63,-2.588) 4(1.9,-2.588) 5(1.9,2.612) 6(0.63,2.612) 7(-0.64,2.612) 8(-1.91,2.612)
  silkscreen extent -2.86,-2.71 2.49,1.11
SO-G8/Y2.2#2 [mm]
  rect 0.55x2.2 smd: 1(-1.905,-2.6) 2(-0.635,-2.6) 3(0.635,-2.6) 4(1.905,-2.6) 5(1.905,2.6) 6(0.635,2.6) 7(-0.635,2.6) 8(-1.905,2.6)
  silkscreen extent -2.85,-2.72 2.5,1.1
SO-G16 [mm]
  rect 0.6x2.2 smd: 1(-4.445,-2.6) 2(-3.175,-2.6) 3(-1.905,-2.6) 4(-0.635,-2.6) 5(0.635,-2.6) 6(1.905,-2.6) 7(3.175,-2.6) 8(4.445,-2.6) 9(4.445,2.6) 10(3.175,2.6) 11(1.905,2.6) 12(0.635,2.6) 13(-0.635,2.6) 14(-1.905,2.6) 15(-3.175,2.6) 16(-4.445,2.6)
  silkscreen extent -5.42,-2.72 5,1.1
SO-G16/C5.85#1 [mm]
  rect 0.6x1.55 smd: 1(-4.452,-2.93) 2(-3.182,-2.93) 3(-1.912,-2.93) 4(-0.642,-2.93) 5(0.628,-2.93) 6(1.898,-2.93) 7(3.168,-2.93) 8(4.438,-2.93) 9(4.438,2.92) 10(3.168,2.92) 11(1.898,2.92) 12(0.628,2.92) 13(-0.642,2.92) 14(-1.912,2.92) 15(-3.182,2.92) 16(-4.452,2.92)
  silkscreen extent -5.4,-3.05 4.99,1.75
SO-G16/C5.85#2 [mm]
  rect 0.6x1.55 smd: 1(-4.445,-2.925) 2(-3.175,-2.925) 3(-1.905,-2.925) 4(-0.635,-2.925) 5(0.635,-2.925) 6(1.905,-2.925) 7(3.175,-2.925) 8(4.445,-2.925) 9(4.445,2.925) 10(3.175,2.925) 11(1.905,2.925) 12(0.635,2.925) 13(-0.635,2.925) 14(-1.905,2.925) 15(-3.175,2.925) 16(-4.445,2.925)
  silkscreen extent -5.39,-3.05 5,1.75
SO-G16/D10.4 [mm]
  rect 0.6x2.15 smd: 1(-4.445,-4.625) 2(-3.175,-4.625) 3(-1.905,-4.625) 4(-0.635,-4.625) 5(0.635,-4.625) 6(1.905,-4.625) 7(3.175,-4.625) 8(4.445,-4.625) 9(4.445,4.625) 10(3.175,4.625) 11(1.905,4.625) 12(0.635,4.625) 13(-0.635,4.625) 14(-1.905,4.625) 15(-3.175,4.625) 16(-4.445,4.625)
  silkscreen extent -5.42,-4.75 5.2,3.15
SOP65P780-28L [mm]
  oval 1.8x0.35 smd: 1(-3.396,4.231) 2(-3.396,3.581) 3(-3.396,2.931) 4(-3.396,2.281) 5(-3.396,1.631) 6(-3.396,0.981) 7(-3.396,0.331) 8(-3.396,-0.319) 9(-3.396,-0.969) 10(-3.396,-1.619) 11(-3.396,-2.269) 12(-3.396,-2.919) 13(-3.396,-3.569) 14(-3.396,-4.219) 15(3.404,-4.219) 16(3.404,-3.569) 17(3.404,-2.919) 18(3.404,-2.269) 19(3.404,-1.619) 20(3.404,-0.969) 21(3.404,-0.319) 22(3.404,0.331) 23(3.404,0.981) 24(3.404,1.631) 25(3.404,2.281) 26(3.404,2.931) 27(3.404,3.581) 28(3.404,4.231)
  silkscreen extent -3.52,-5.29 2.1,5.31
SWT-6 [mm]
  rect 1.5x1.5 hole 1: 1(-0.009,-0.001)
  round 1.5 hole 1: 1(5.991,-0.001) 2(-0.009,-5.001) 2(5.991,-5.001)
  silkscreen extent -0.01,-5.5 5.99,0.5
SWT-9 [mm]
  rect 1.8x1.8 hole 1.3: 1(0,0)
  round 1.8 hole 1.3: 1(12.5,0) 2(0,-5.08) 2(12.5,-5)
  silkscreen extent 1,-7.5 11.5,2.5
TSSO6X6-G20/D6.6 [mm]
  rect 0.3x1.6 smd: 1(-2.925,-2.85) 2(-2.275,-2.85) 3(-1.625,-2.85) 4(-0.975,-2.85) 5(-0.325,-2.85) 6(0.325,-2.85) 7(0.975,-2.85) 8(1.625,-2.85) 9(2.275,-2.85) 10(2.925,-2.85) 11(2.925,2.85) 12(2.275,2.85) 13(1.625,2.85) 14(0.975,2.85) 15(0.325,2.85) 16(-0.325,2.85) 17(-0.975,2.85) 18(-1.625,2.85) 19(-2.275,2.85) 20(-2.925,2.85)
  silkscreen extent -3.75,-2.97 3.3,1.65
USBmini [mm]
  round 1.2 hole 1.2: 0(-2.2,5.85) 0(2.2,5.85)
  rect 0.5x2.5 smd: 1(-1.6,8.43) 2(-0.8,8.43) 3(0,8.43) 4(0.8,8.43) 5(1.6,8.45)
  rect 2x2.5 smd: 6(-4.45,8.43) 6(-4.45,3.158) 6(4.45,8.43) 6(4.45,3.158)
  silkscreen extent -4.45,0 4.45,9

## Part data
A1: library part PJEZ0
C1 C2_1 C5_1 C22_1 C28 C37 C38 C39 C40 C58 C200 C201: library part "Cap Semi", "Capacitor"
C1_1 C3_1 C4 C4_1 C5 C6 C7 C8 C9 C10 C11 C12 C13 C14 C15 C16 C17 C18 C19 C20 C21 C23 C24 C25 C26 C30 C31 C32 C33 C35 C36 C50 C51 C52 C53 C54 C55 C56 C57 C60 C61 C62 C63 C64 C65 C66 C302 C303 C304 C310: library part "Cap Semi", "Capacitor (Semiconductor SIM Model)"
C2 C22: "Capacitor (Semiconductor SIM Model)"
C3 C34: library part "Cap Pol1", "Polarized Capacitor (Radial)"
D1 D1_1: library part Diode, "Diode"
D3 D4 D5 D6 D7 D8 D9 D10 D11 D12 D13: library part "D Zener", "Zener Diode"
D3_1: library part Diode, "Default Diode"
DS1: "Typical INFRARED GaAs LED"
J1: library part "Header 6", "Header, 6-Pin"
JP1: library part "Header 5X2", "Header, 5-Pin, Dual row"
JP4: library part MHDR2X13, "Header, 13-Pin, Dual row"
JP5 JP6: library part "Header 10X2", "Header, 10-Pin, Dual row"
JP9: library part "Header 3", "Header, 3-Pin"
K1 K2: library part BS115, "Single-Pole Dual-Throw Relay"
Q1 Q5: "HEXFET Power MOSFET"
Q1_1: library part GT109
Q3: library part GT122, "Bipolar transistor"
Q4 Q6: library part GT122
Q7 Q8 Q9: library part IRF7301, "HEXFET Power MOSFET"
R1 R1_1 R2 R3 R4 R5 R6 R7 R8 R9 R10 R11 R12 R13 R16 R17 R18 R19 R20 R21 R22 R23 R24 R25 R26 R27 R28 R29 R30 R31 R32 R33 R34 R35 R36 R37 R38 R39 R40 R41 R43 R45 R46 R47 R48 R49 R51 R53 R54 R55 R56 R57 R58 R59 R60 R61 R62 R63 R64 R65 R66 R67 R68 R69 R70 R71 R72 R73 R74 R75 R76 R77 R78 R79 R80 R81 R82 R84 R92 R95 R96 R97 R98 R99 R102 R103 R111 R112 R113 R114 R115 R116 R117 R118 R120 R121 R122 R123 R124 R125 R126 R127 R128 R129 R301 R302 R303 R304 R305 R306: library part Res2, "Resistor"
R9_1 R10_1 R12_1 R13_1: library part RES
S1 S2 S3 S4 S5: "Switch"
S6: library part SWT-9, "Switch"
U2 U9: "Ultra-Low Offset Voltage Operational Amplifier"
U4_1: "Reset IC"
U5: library part LP2980AIM5-3.3, "Micropower SOT, 50 mA Ultra Low-Dropout Regulator"
U5_1: library part F00817ASD
U6 U10: "8-Channel Analog Multiplexer/Demultiplexer"
U12: library part KXO-97
U13: library part LPC2368FBD100
X1 X1_1 X2 X2_1 X3 X3_1 X4 X4_1 X5 X5_1 X6 X6_1 X7 X7_1 X8 X8_1 X9 X10 X11 X12 X13 X14 X15 X16 X17 X18 X19 X20 X21 X22 X23 X24 X25 X26 X27 X301 X302 X303 X304 X305 X306 X307 X308: library part Socket, "Socket"
Y1 Y2 Y3 Y4 Y5: library part XTAL, "Crystal Oscillator"

## Free pads (board coordinates)
  round 5 hole 3.5: 0(6,4.7) 0(6,106.7) 0(74,4.7) 0(74,106.7) 0(96.824,106.701) 0(96.824,4.701) 0(164.824,4.701) 0(164.824,106.701)
  round 3.5 hole 2.5: 51(6.5,98.6) 52(4.95,62.65) 53(83.9,62.65) 54(82.4,98.6)

## Via types
v1: diameter 1.1, hole 0.6, Top Layer to Bottom Layer, 491 vias
v2: diameter 1.2, hole 0.7, Top Layer to Bottom Layer, 63 vias
v3: diameter 1.5, hole 1, Top Layer to Bottom Layer, 12 vias
v4: diameter 1.27, hole 0.7, Top Layer to Bottom Layer, 3 vias
v5: diameter 1.2, hole 0.6, Top Layer to Bottom Layer, 1 vias

## Nets (pads, with @x,y where several pads share a name; then routed paths per layer and width w, separated by ;. In a path a pad name is that pad's centre, name@x,y a point inside that pad or via, vN(x,y) a via of type N, cw(c..) or ccw(c..) an arc to the next point about the centre after c; other vN are vias at no path point)
485-DD: JP1.4 U1.10 | length 32.4
  Top Layer w0.5: U1.10@113.852,4.178 117.178,4.178 118.754,2.602 124.78,2.602 125.982,1.4 141.46,1.4 JP1.4@144.021,3.961
485-RX: JP1.9 U1.13 | length 26.2
  Top Layer w0.5: U1.13@113.852,7.988 116.318,7.988 119.554,4.752 127.483,4.752 128.732,6.002 128.732,6.852 129.733,7.852 135.05,7.852 JP1.9@136.401,6.501
485-TX: JP1.10 U1.12 | length 24.9
  Top Layer w0.5: U1.12@113.852,6.718 116.138,6.718 119.104,3.752 125.282,3.752 126.583,2.451 134.89,2.451 JP1.10@136.401,3.961
+3V3: C1.1 C30.1 C31.1 C32.1 C58.2 JP1.3 R9.1 R10.2 R20.2 R92.2 R99.2 R111.1 R112.2 R113.2 R114.2 R115.2 R116.2 R118.1 R120.2 R128.1 R129.1 U3.22 U3.32 U3.48 U13.13 U13.28 U13.42 U13.54 U13.71 U13.84 U13.96 X6.1 | length 255.2
  Top Layer w0.25: R116.2@99.059,56.624 100.75,56.624 R115.2@101.659,56.624 104.489,56.624 104.502,56.637 ; 101.702,59.306 101.702,59.337 ; U13.71@102.266,87.803 103.768,86.301 103.774,86.301 103.925,86.151 v1(104.8,86.151) ; U13.84@103.68,81.085 105.246,82.651 v1(105.274,82.651) ; R9.1@106.7,101.576 106.65,101.576 106.602,101.528 105.249,100.175 105.249,96.84 U13.54@108.276,93.813 109.674,92.415 v1(109.674,92.401) ; U13.96@107.923,76.843 108.801,77.721 108.801,79.571 v1(108.451,79.921) ; v1(113.024,90.451) 113.046,90.451 U13.42@114.64,92.045 ; v1(114.524,81.201) U13.13@116.055,79.671 ; v1(116.024,86.923) 116.574,86.373 118.867,86.373 U13.28@119.59,87.096
  Top Layer w0.3: 100.726,56.601 100.75,56.624 100.776,56.651 R114.2@100.776,59.251
  Top Layer w0.4: v1(98.725,14.704) 117.68,14.704 118.08,15.104 132.283,15.104 v1(132.583,15.404) ; R99.2@130.683,24.256 130.694,24.267 R112.2@130.694,27.201 ; R10.2@132.574,34.392 v1@132.574,36.009 ; R10.2@132.574,35.343 R10.2@132.807,35.11
  Top Layer w0.5: R112.2@130.694,27.201 131.2,27.201 v2(132.557,28.558) 131.157,29.959 R113.2@130.707,29.959 ; v1(132.207,51.314) 143.21,51.314 144.16,52.264 v1(148.162,52.264)
  Top Layer w0.6: v1@113.252,57.186 113.202,57.186 113.152,57.186 v1(113.202,57.137) 118.946,57.137 R20.2@121.309,57.137 ; R120.2@118.531,57.201 126.562,57.201 128.805,57.201 v1(132.374,57.201) v1@132.474,57.201
  Top Layer w0.8: v1(132.574,10.751) 143.863,10.751 v1(143.96,10.654)
  Bottom Layer w0.25: U3.22@106.024,55.509 v1(107.352,56.837) ; U3.32@107.792,60.706 109.352,59.146 v1(109.352,59.137) ; v1(113.202,57.137) 114.016,57.137 U3.48@115.11,58.231
  Bottom Layer w0.3: X6.1@96.822,31.501 96.822,29.105 96.074,28.357 96.074,21.856 97.275,20.655 98.125,20.655 98.775,20.005 98.775,14.754 v1(98.725,14.704)
  Bottom Layer w0.5: v1@148.161,52.213 148.161,52.115 148.162,58.858 ; R129.1@148.162,59.608 R128.1@148.162,62.408
  Bottom Layer w0.7: 121.671,85.221 127.455,85.221
  Bottom Layer w0.8: 121.353,82.951 122.053,83.651 ; 127.455,85.221 128.324,84.352 128.324,81.351 127.324,80.351 127.324,77.601 128.356,76.57 ; 128.355,76.569 129.255,75.669 129.255,74.696 129.733,74.219 129.733,72.118 129.283,71.668 129.283,69.568 ; 129.255,69.568 129.255,67.669 130.907,66.018 ; 130.906,66.017 131.556,65.366 131.556,63.116 132.506,62.166 ; 132.415,62.261 132.508,62.168 132.574,62.101 ; 132.557,62.091 132.557,54.265 132.357,54.065 132.357,50.564 132.574,50.347 132.574,20.551 ; v1(132.574,10.751) 132.574,20.551
  Bottom Layer w1: v1(143.96,10.654) 143.96,6.503 JP1.3@144.01,6.453
  other v1: 132.583,36.109
+5V: C17.2 C19.2 C54.2 C55.2 C57.2 C60.2 D5.2 JP1.5 JP4.15 JP6.3 JP6.4 K1.4 K2.4 R46.2 R53.2 R56.2 R67.2 R73.2 R95.2 R96.1 R97.2 R98.2 R103.2 U1.1 U1.14 U2.7 U4.19 U4.20 U5.1 U5.3 U6.16 U9.7 U10.16 U11.3 U23.8 U24.15 X10.1 X12.1 | length 430.8
  Top Layer w0.25: v1(132.624,101.877) 132.799,101.701 U24.15@132.799,98.676 132.799,96.633 v1(133.258,96.175) ; U24.15@132.774,98.676 U24.15@132.774,99.201
  Top Layer w0.3: U4.19@112.577,31.71 112.577,30.209 v1(112.878,29.908) 113.229,30.258 113.229,31.708 U4.20@113.227,31.71 ; v1@144.024,85.251 144.989,86.216 U2.7@146.374,86.216
  Top Layer w0.4: R95.2@93.024,92.901 93.377,92.548 93.824,92.101 v1@93.824,91.151 ; X10.1@94.322,16.501 X12.1@96.822,16.501 v1@111.075,16.501 ; U1.1@108.652,11.798 109.983,11.798 112.523,9.258 113.823,9.258 U1.14@113.829,9.252 ; v1(111.178,22.656) 133.834,22.656 134.777,23.599 U6.16@139.954,23.599 ; U11.3@119.205,41.127 121.289,41.127 123.805,38.611 v1(137.309,38.611) ; R98.2@129.733,36.709 129.733,38.61 ; 137.309,54.168 137.309,54.265 ; C54.2@137.343,55.281 137.343,53.878 v1@138.006,53.214 ; v1@138.209,53.214 U10.16@139.984,53.219 ; K1.4@164.18,94.541 K2.4@164.18,85.241 164.18,85.196 K2.4@164.224,85.151
  Top Layer w0.5: v1@92.497,102.727 92.547,102.677 93.319,101.905 U23.8@93.319,100.901 ; v1(137.335,23.656) C19.2@137.335,25.355 ; U5.1@141.399,107.151 141.574,107.151 141.604,107.122 141.974,106.751 144.074,106.751 ; U5.3@141.399,109.051 U5.3@141.624,109.051 ; U5.3@141.629,109.056 141.974,109.401 144.274,109.401 ; 144.274,102.019 U9.7@146.385,102.019
  Top Layer w0.6: v1(137.824,48.201) 143.586,48.201 144.286,48.901 150.656,48.901 151.356,48.201 161.124,48.201 162.525,46.8 162.724,46.601 162.774,46.601 164.974,46.601 165.674,45.901 168.724,45.901 169.424,46.601 172.274,46.601 JP4.15@172.324,46.601 ; R53.2@162.762,36.645 v1(164.368,36.645) ; R67.2@162.762,43.245 v1(164.368,43.245) ; R56.2@162.774,39.901 164.324,39.901 v1(164.374,39.951) ; R46.2@162.824,33.301 v1@163.824,33.301
  Top Layer w0.8: v1(143.074,78.701) 143.574,79.201 143.574,85.273 143.574,89.851 144.274,90.551 v1@144.274,91.274 ; v1(143.41,97.326) 143.31,97.426 143.31,100.376 144.274,101.341 144.274,106.692 144.759,107.177 144.759,109.177 144.274,109.662 ; 144.274,109.401 v1(144.274,110.601)
  Bottom Layer w0.3: v1@92.497,102.727 92.174,102.404 92.174,93.751 93.39,92.536 93.774,92.151 93.774,91.151 v1@93.824,91.151 ; R97.2@132.77,98.119 132.77,96.663 v1(133.258,96.175) ; v1(164.274,46.601) v1@164.374,46.501 ; v1(164.368,36.645) v1@164.374,36.651
  Bottom Layer w0.4: v1@92.447,102.727 92.497,102.727 92.497,102.377 93.473,101.401 98.274,101.401 99.574,102.701 107.424,102.701 108.174,103.451 110.474,103.451 113.324,106.301 JP6.3@113.714,106.301 ; v1(111.078,16.504) v1@111.178,16.604 ; v1(111.228,10.453) 111.178,10.503 111.178,26.757 112.878,28.457 v1(112.878,29.908) ; v1@137.324,48.201 v1(137.824,48.201) ; 137.359,53.214 v1(138.259,53.214) ; v1(143.724,100.851) 144.235,100.851 C57.2@146.361,102.977
  Bottom Layer w0.5: v1(132.624,101.877) 132.824,102.077 134.508,102.077 135.733,100.851 v1(143.724,100.851) ; v1@144.024,85.241 145.778,85.241 158.873,85.241 159.273,84.842 160.503,84.842 160.903,85.241 K2.4@164.18,85.241 ; v1@164.374,46.501 164.374,22.079 R103.2@166.105,20.349
  Bottom Layer w0.6: C17.2@161.715,39.911 v1(164.374,39.951) ; K1.4@164.18,94.541 164.59,94.951 D5.2@167.674,94.951 D5.2@167.724,94.951
  Bottom Layer w0.8: JP6.4@113.714,108.841 115.624,110.751 144.124,110.751 v1(144.274,110.601) ; 137.274,19.051 137.274,16.039 140.281,13.032 141.481,11.833 JP1.5@141.481,6.501 ; 137.324,19.051 137.324,27.492 136.808,28.008 136.808,29.343 137.909,30.443 137.909,33.475 137.324,34.06 137.324,42.501 137.324,56.728 137.588,56.992 137.588,58.639 137.074,59.153 137.074,60.601 137.324,60.851 137.324,67.351 137.324,72.901 v1@143.074,78.651 ; v1(143.41,97.326) 143.41,92.124 v1(144.26,91.274)
  Bottom Layer w1: JP6.3@113.714,106.301 JP6.4@113.714,108.841
  other v1: 164.115,33.309 143.71,85.273 93.848,90.874 92.647,102.777
+5V_IZ: 
+IAKB1: JP4.32 R123.1 R124.2 | length 16.5
  Top Layer w0.5: R124.2@173.568,80.064 173.524,80.101 173.524,80.064 173.524,79.151 175.374,77.301 175.374,76.558 R123.1@175.387,76.558
  Bottom Layer w0.4: v1(174.574,78.101) 173.518,77.044 173.518,68.248 JP4.32@174.814,66.951
+IAKB2: JP4.34 R63.1 R64.2 | length 13
  Top Layer w0.5: JP4.34@174.814,69.491 174.814,73.616 R63.1@174.818,73.62 175.618,73.62 176.368,74.37 176.368,79.721 R64.2@176.018,80.072 ; R63.1@174.814,73.091 175.374,73.651 175.674,73.651 ; R64.2@176.374,80.051 176.374,80.101 R64.2@176.399,80.076
+UOUT: JP1.2 JP4.2 R16.2 R102.2 | length 47
  Top Layer w0.5: 168.943,16.604 v1(170.593,14.954)
  Top Layer w1: JP1.2@146.561,3.961 147.77,3.961 153.66,9.851 157.162,9.851 158.164,10.853 163.214,10.853 163.965,11.604 174.814,22.453 JP4.2@174.814,28.851
  Bottom Layer w0.5: R102.2@168.93,16.411 169.136,16.411 v1(170.593,14.954)
  Bottom Layer w1: JP4.2@174.764,28.841 174.774,28.851 JP4.2@174.814,28.851
-5V: C18.2 C56.2 JP1.8 JP6.6 U2.4 U9.4 | length 183
  Top Layer w0.4: JP6.6@116.254,108.841 117.764,110.351 135.574,110.351 136.374,109.551 136.374,105.251 134.174,103.051 129.724,103.051 129.424,102.751 129.424,93.901 130.074,93.251 130.074,81.201 v1(130.724,80.551) ; v1(152.012,90.024) 152.012,89.194 U2.4@151.574,88.756 U2.4@152.079,88.756 ; 152.424,105.051 152.474,105.051
  Top Layer w0.5: U9.4@151.585,104.559 151.894,104.559 v1(153.063,105.728)
  Bottom Layer w0.4: v1(130.074,90.201) 141.274,90.201 ; v1(130.724,80.551) 132.874,78.401 132.874,70.519 133.007,70.386 133.007,69.269 132.874,69.135 132.874,63.351 133.374,62.851 133.374,53.831 133.308,53.765 133.308,50.981 133.374,50.914 133.374,44.851 133.824,44.401 133.824,19.901 133.724,19.801 133.724,13.853 137.659,9.919 137.659,5.243 JP1.8@138.941,3.961 ; v1(136.674,105.601) 144.874,105.601 145.424,105.051 152.412,105.051 ; 141.274,90.151 141.324,90.151 142.174,89.301 152.012,89.301 154.024,89.301 C18.2@154.074,89.251 ; 152.474,105.051 152.424,105.051 ; C56.2@152.524,103.751 152.424,103.851 152.424,105.051 ; v1(153.063,105.728) 152.412,105.078 152.412,105.051 ; 152.412,105.051 152.424,105.051
-5V_IZ: 
-IAKB1: JP4.31 R13.2 R123.2 | length 15.9
  Top Layer w0.5: R13.2@170.768,80.064 170.768,78.377 R123.2@172.587,76.558
  Bottom Layer w0.4: v1(171.024,78.12) 171.024,68.201 JP4.31@172.274,66.951
-IAKB2: JP4.33 R60.2 R63.2 | length 13.2
  Top Layer w0.5: R60.2@168.21,80.084 168.21,76.627 171.217,73.62 R63.2@172.018,73.62 172.018,69.748 JP4.33@172.274,69.491 JP4.33@172.524,69.741 ; R63.2@172.424,73.501 R63.2@172.524,73.401
-UOUT: JP1.1 JP4.1 R18.1 | length 46.2
  Top Layer w1: JP1.1@146.561,6.501 151.911,11.851 156.662,11.851 157.314,12.503 162.414,12.503 172.274,22.364 JP4.1@172.274,28.801 ; R18.1@155.839,6.452 157.39,6.452 v1(157.44,6.502) ; v1@156.89,12.153 156.89,12.103 v1(156.94,12.053)
  Bottom Layer w0.5: v1(156.94,12.053) 156.94,7.002 v1(157.44,6.502)
CANH: JP4.17 R17.2 U11.7 | length 58.2
  Top Layer w0.4: U11.7@124.905,42.397 126.341,42.397 127.156,43.212 R17.2@128.456,43.212 ; v1(126.706,50.364) 126.706,50.314 126.756,50.264 143.337,50.264 144.036,50.963 144.486,50.963 ; 144.486,50.964 151.562,50.964 152.662,49.864 171.582,49.864 JP4.17@172.274,49.171 ; JP4.17@172.26,49.171 JP4.17@172.267,49.163
  Bottom Layer w0.4: v1(126.706,42.762) v1(126.706,50.364)
CANL: JP4.18 R17.1 U11.6 | length 61.6
  Top Layer w0.4: U11.6@124.905,41.127 126.291,41.127 127.053,40.364 R17.1@128.453,40.364 ; v1(127.806,49.063) 128.106,49.363 143.437,49.363 143.937,49.864 151.262,49.864 152.062,49.063 169.217,49.063 170.379,47.901 173.544,47.901 JP4.18@174.814,49.171 JP4.18@174.794,49.171
  Bottom Layer w0.4: v1(126.656,40.761) 127.806,41.912 127.806,43.962 127.506,44.262 127.506,48.763 v1(127.806,49.063)
DB1: 
DB2: 
DB3: 
DB4: 
DB5: 
DB6: 
DB7: 
DT1: JP4.9 R46.1 R47.1 | length 20.9
  Top Layer w0.5: 157.187,33.358 157.202,33.373 157.231,33.345 158.187,33.345 159.962,33.345 160.197,33.11 161.555,31.751 164.307,31.751 165.366,32.809 165.366,34.51 166.516,35.66 166.516,37.511 168.017,39.011 JP4.9@172.274,39.011
DT2: JP4.10 R53.1 R54.1 | length 22.1
  Top Layer w0.5: 157.187,36.658 R54.1@158.187,36.658 159.949,36.658 159.962,36.645 160.197,36.41 161.605,35.001 164.507,35.001 165.616,36.11 165.616,37.961 167.956,40.301 173.524,40.301 JP4.10@174.814,39.011
DT3: JP4.11 R56.1 R58.1 | length 17.2
  Top Layer w0.5: 157.187,39.958 157.187,39.945 158.187,39.945 159.962,39.945 160.197,39.71 161.605,38.301 164.606,38.301 167.906,41.601 172.274,41.601 JP4.11@172.274,41.551
DT4: JP4.12 R67.1 R68.1 | length 19.3
  Top Layer w0.5: 157.187,43.258 157.2,43.245 158.187,43.245 159.962,43.245 160.216,42.99 161.605,41.601 166.506,41.601 167.706,42.801 173.564,42.801 JP4.12@174.814,41.551
DT5: JP4.13 R73.1 R75.1 | length 16.1
  Top Layer w0.5: 157.187,46.558 157.193,46.551 158.187,46.551 159.974,46.551 160.175,46.35 160.345,46.18 161.624,44.901 167.674,44.901 168.484,44.091 JP4.13@172.274,44.091